# Altium PCB bb_kinetic_harvester.PcbDoc
Units mil, origin at the board's own origin, x right, y up, seen from the top; angles counter-clockwise.
Board outline 1595 x 1050 mil, 2 copper layers (Top Layer, Bottom Layer); 17 components, 23 nets, 87 pads, 19 vias.
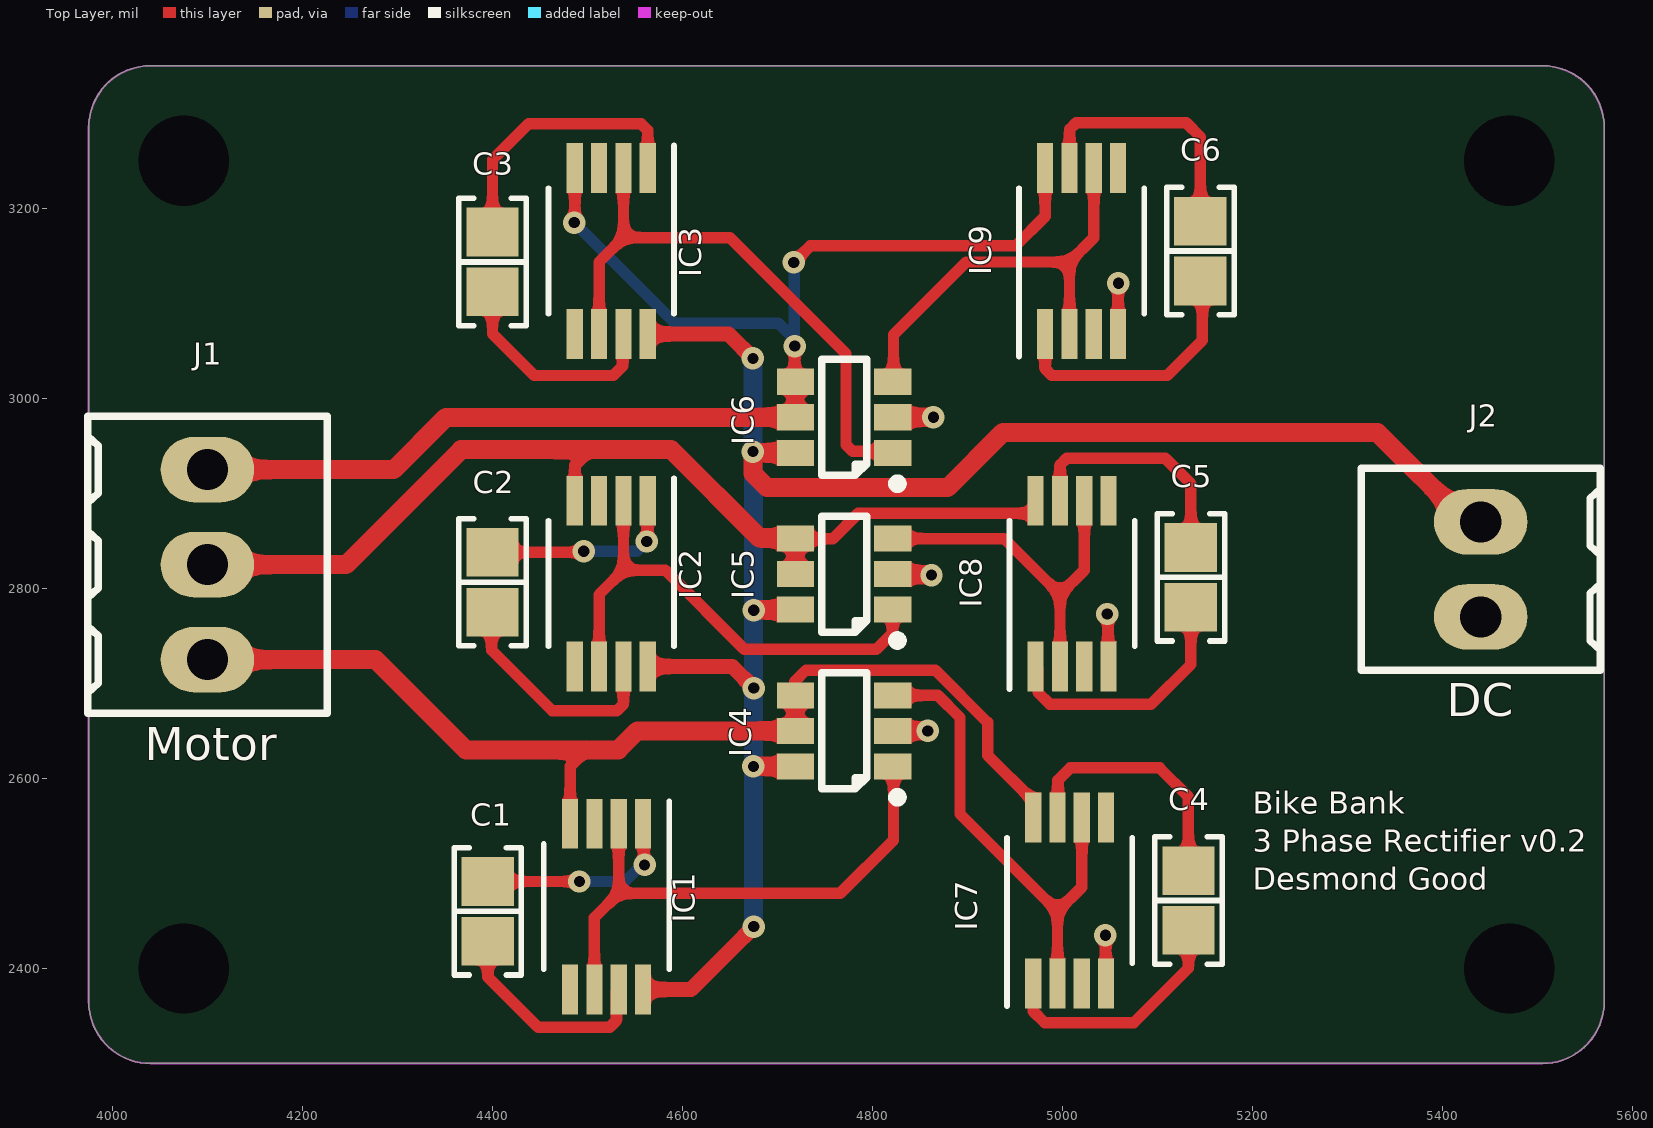
[diagram p0: Top Layer view]
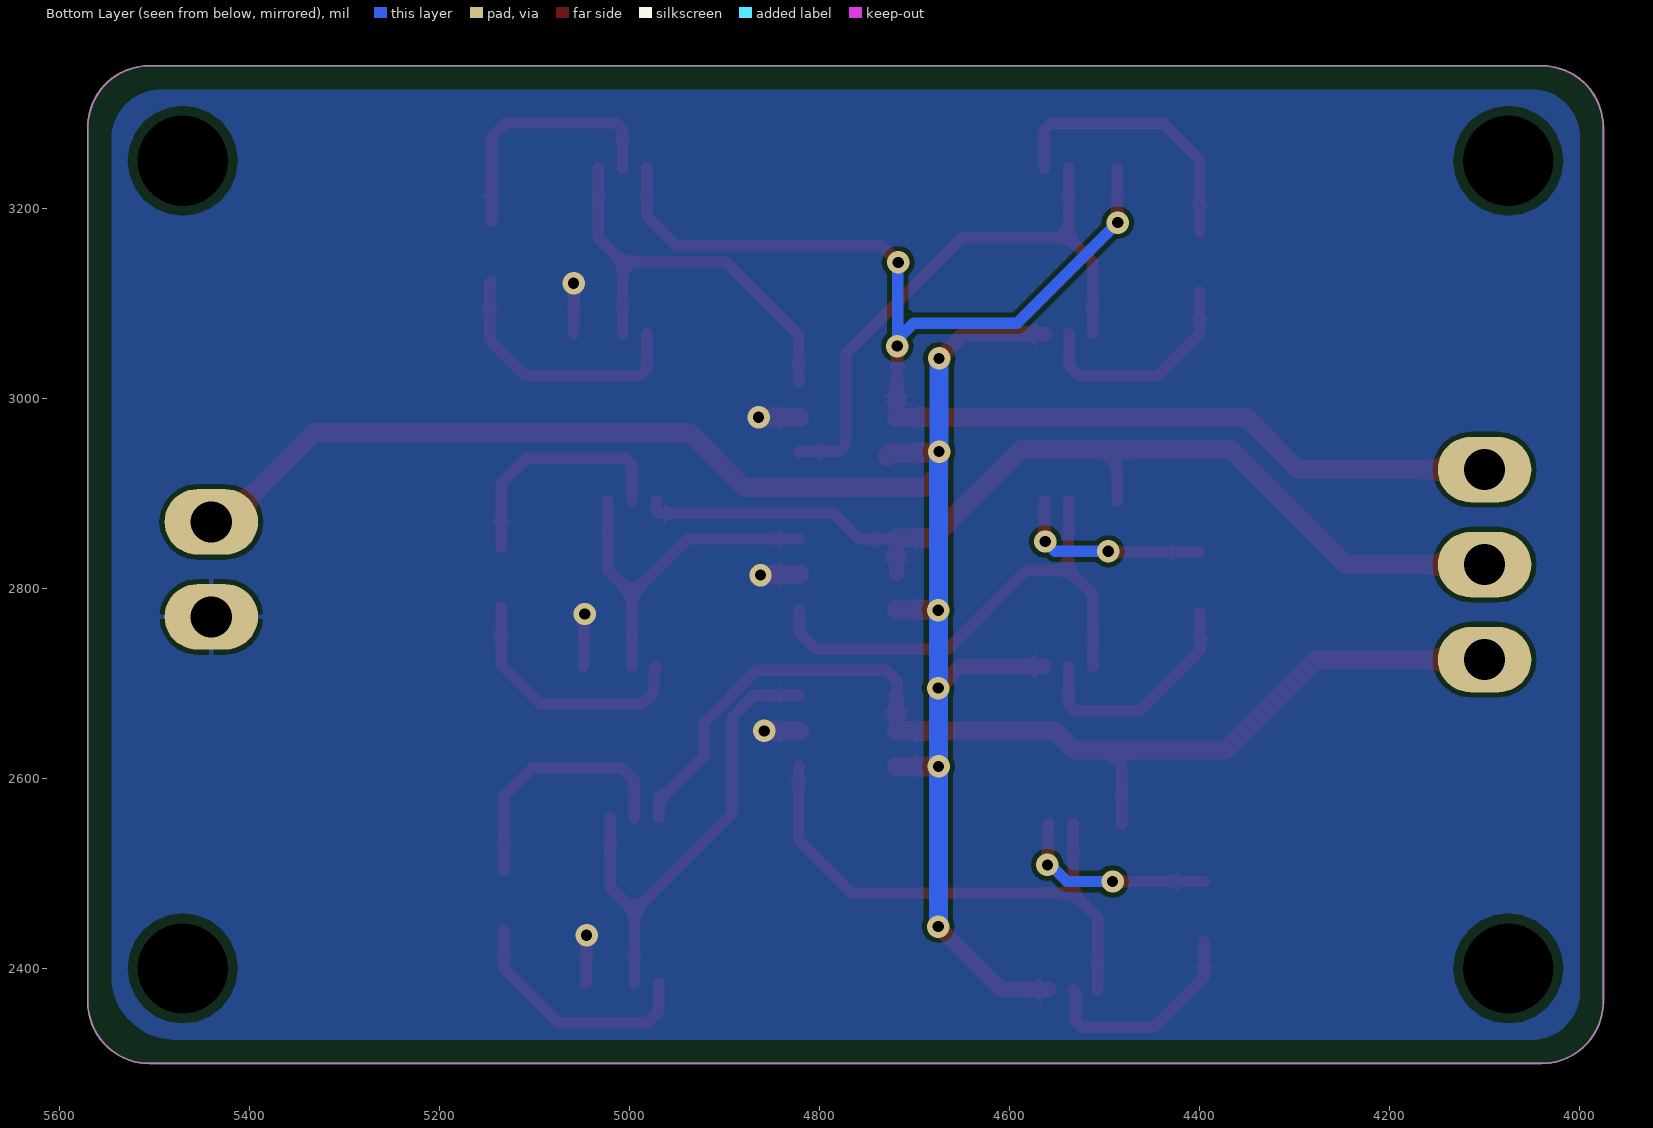
[diagram p1: Bottom Layer view, seen from below]
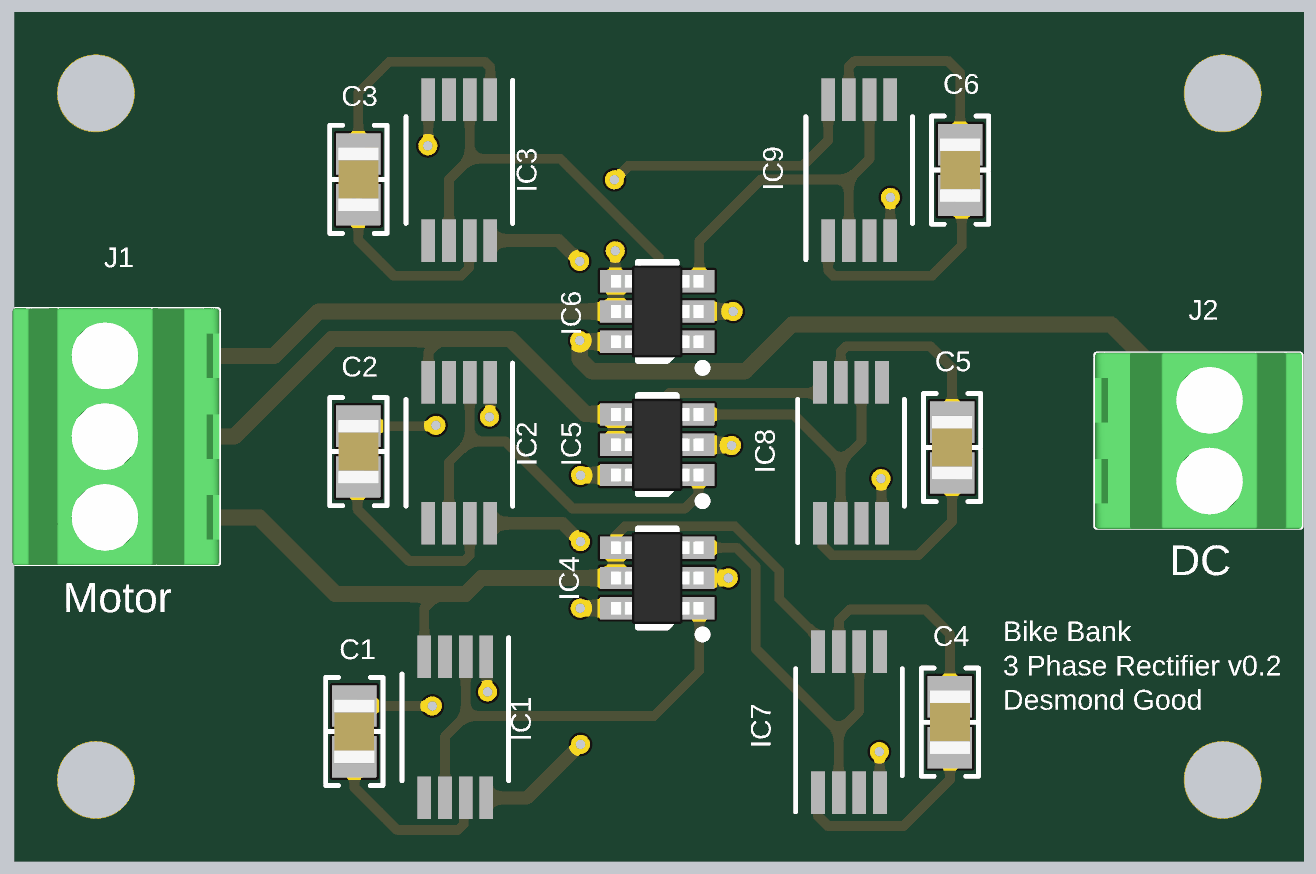
[diagram p2: 3D render of the assembled board from above, using the file's embedded part models]

## Layer stack, top to bottom
Top Solder: solder mask 0.4, Solder Resist, Dk 3.5
Top Layer: signal copper 1.4
Dielectric 1: dielectric 12.6, FR-4, Dk 4.8
Bottom Layer: signal copper 1.4
Bottom Solder: solder mask 0.4, Solder Resist, Dk 3.5

## Board outline
3975,2365 3975,3285 cw(c4040,3285) 4040,3350 5505,3350 cw(c5505,3285) 5570,3285 5570,2365 cw(c5505,2365) 5505,2300 4040,2300 cw(c4040,2365)

## Design rules (kind name [scope] priority, off if disabled: settings)
AssemblyTestpoint [All] p1: testpointundercomponent=FALSE minsize=40 maxsize=100 preferedsize=60 minholesize=0 maxholesize=40 preferedholesize=32 testpointgrid=1 usegrid=TRUE gridtolerance=0.01 allowsidetop=TRUE allowsidebottom=TRUE
BoardOutlineClearance [All] p1: gap=7.87 ignorepadtopadclearanceinfootprint=FALSE
Clearance [All] p1: gap=5 ignorepadtopadclearanceinfootprint=FALSE except(9.84: Arc-Hole Track-Hole SMDPad-Hole THPad-Hole Via-Hole Fill-Hole Poly-Hole Region-Hole Text-Hole)
ComponentClearance [All] p1: gap=5 collisioncheckmode=3 verticalgap=5 showdistances=TRUE
DiffPairsRouting [All] p1: maxlimit=10 minlimit=5 mostfreqgap=5 toplayer_minwidth=5 toplayer_maxwidth=1000 toplayer_prefwidth=5 bottomlayer_minwidth=5 bottomlayer_maxwidth=1000 bottomlayer_prefwidth=5 maxuncoupledlength=500
Height [All] p1: minheight=0 maxheight=71497.94 prefheight=500
HoleSize [All] p1: absolutevalues=TRUE maxlimit=248.03 minlimit=11.81 maxpercent=80.000 minpercent=20.000
HoleToHoleClearance [All] p1: gap=9.84 allowstackedmicrovias=FALSE
MinimumAnnularRing [All] p1: minimumring=3
MinimumSolderMaskSliver [All] p1: minsoldermaskwidth=0
PlaneClearance [All] p1: clearance=5
PlaneConnect PlaneConnectPowerPads [InPadClass('PowerPads')] p1: planeconnectstyle=Direct reliefexpansion=20 reliefentries=4 reliefconductorwidth=10 reliefairgap=10
PlaneConnect [All] p2: pad.planeconnectstyle=Relief pad.reliefexpansion=11.81 pad.reliefentries=4 pad.reliefconductorwidth=5 pad.reliefairgap=5 via.planeconnectstyle=Direct via.reliefexpansion=11.81 via.reliefentries=4 via.reliefconductorwidth=5 via.reliefairgap=5
PolygonConnect PolygonConnectPowerPads [All vs (InPadClass('PowerPads'))] p1: connectstyle=Direct reliefconductorwidth=10 reliefentries=4 polygonreliefangle="90 Angle" airgapwidth=10
PolygonConnect [All] p2: thpad.connectstyle=Relief thpad.reliefconductorwidth=5 thpad.reliefentries=4 thpad.polygonreliefangle="90 Angle" thpad.airgapwidth=5 smdpad.connectstyle=Relief smdpad.reliefconductorwidth=5 smdpad.reliefentries=4 smdpad.polygonreliefangle="90 Angle" smdpad.airgapwidth=5 via.connectstyle=Direct via.reliefconductorwidth=5 via.reliefentries=4 via.polygonreliefangle="90 Angle" via.airgapwidth=5
RoutingVias [All] p1: holewidth=11.81 width=23.62 viastyle="Through Hole" minholewidth=11.81 minwidth=23.62 maxholewidth=23.62 maxwidth=259.84
SilkToSilkClearance [All] p1: silktosilkclearance=0
SilkToSolderMaskClearance [IsPad] p1: minsilkscreentomaskgap=5 clearancetoexposedcopper=TRUE
SolderMaskExpansion [All] p1: expansion=2.95 istentingtop=FALSE
Width [All] p1: maxlimit=1000 minlimit=5 preferedwidth=5 minimp=50.000000 maximp=50.000000 favimp=50.000000
19 further rules are at their usual default settings.

## Components (designator, comment, footprint, x,y, rotation, side; value= is the part's Value field where it differs from the comment)
C1 "1µF" "CAP 0805_2012" 4395,2460 r90 top
C2 "1µF" "CAP 0805_2012" 4400,2806.5 r90 top
C3 "1µF" "CAP 0805_2012" 4400,3143.5 r90 top
C4 "1µF" "CAP 0805_2012" 5132.4,2471.5 r270 top
C5 "1µF" "CAP 0805_2012" 5135,2811.5 r270 top
C6 "1µF" "CAP 0805_2012" 5145,3155 r270 top
IC1 "LM74670QDGKTQ1" TI_8VSSOP 4520,2465 r270 top
IC2 "LM74670QDGKTQ1" TI_8VSSOP 4525,2805 r270 top
IC3 "LM74670QDGKTQ1" TI_8VSSOP 4525,3155 r270 top
IC4 "FDC6401N" "FAIRCHILD SOT-23-6 SUPERSOT-6" 4770,2650 r180 top
IC5 "FDC6401N" "FAIRCHILD SOT-23-6 SUPERSOT-6" 4770,2815 r180 top
IC6 "FDC6401N" "FAIRCHILD SOT-23-6 SUPERSOT-6" 4770,2980 r180 top
IC7 "LM74670QDGKTQ1" TI_8VSSOP 5007.4,2471.5 r90 top
IC8 "LM74670QDGKTQ1" TI_8VSSOP 5010,2805 r90 top
IC9 "LM74670QDGKTQ1" TI_8VSSOP 5020,3155 r90 top
J1 "282834-3" "TE 282834-3" 4100,2825 r90 top
J2 "282834-2" "TE 282834-2" 5440,2820 r270 top

## Footprints (in the part's own frame and the unit in brackets; to place one, negate y for a bottom-side part, rotate by r counter-clockwise, add the part's x,y. Pads: shape width x height; smd on the part's side, far side on the other; paste and mask are expansions set on the pad)
"CAP 0805_2012" [mm] "Chip Capacitor, 2-Leads, Body 2.00x1.20mm, IPC Medium Density"
  rect 1.3x1.4 smd: 1(-0.8,0) 2(0.8,0)
  silkscreen extent -1.7,-0.9 1.7,0.9, body extent -1,-0.64 1,0.64, height 1.26
"FAIRCHILD SOT-23-6 SUPERSOT-6" [mm] "SOT23, 6-Leads, Body 2.9x1.6mm, Pitch 0.95mm, IPC Medium Density"
  rect 1x0.7 smd: 1(-1.3,0.95) 2(-1.3,0) 3(-1.3,-0.95) 4(1.3,-0.95) 5(1.3,0) 6(1.3,0.95)
  silkscreen extent -1.55,-1.55 0.6,1.9, body extent -1.46,-1.45 1.46,1.45, height 1.45
"TE 282834-2" [mm]
  oval 1.75x2.5 hole 1.1: 1(-1.27,0) 2(1.27,0)
  silkscreen extent -2.7,-3.2 2.7,3.2, body extent -2.77,-3.25 2.77,3.25, height 10
"TE 282834-3" [mm]
  oval 1.75x2.5 hole 1.1: 1(-2.54,0) 2(0,0) 3(2.54,0)
  silkscreen extent -3.97,-3.2 3.97,3.2, body extent -4.04,-3.25 4.04,3.25, height 10
TI_8VSSOP [mil]
  rect 52.5x17 smd paste+0 mask+0: 1(-87.25,38.39) 2(-87.25,12.8) 3(-87.25,-12.8) 4(-87.25,-38.39) 5(87.25,-38.39) 6(87.25,-12.8) 7(87.25,12.8) 8(87.25,38.39)
  silkscreen extent -111,-66 66,66, body extent 0,0 10,10, height 10

## Part data
C1 C2 C3 C4 C5 C6: library part GCM21BR71H105KA03L, "CAP CER 1UF 50V X7R 0805", Device Package="0805 (2012 Metric)", Manufacturer="Murata Electronics", Operating Temperature="-55°C ~ 125°C", Ratings=AEC-Q200, Supplier Part Number 1=490-10675-1-ND, Temperature Coefficient=X7R, Tolerance=±10%, Voltage - Rated=50V, Applications=Automotive, Capacitance=1µF, ComponentLink1Description=Datasheet, ComponentLink1URL=https://www.murata.com/~/media/webrenewal/support/library/catalog/products/capacitor/mlcc/c03e.ashx?la=en-us, ComponentLink2Description="DigiKey Link", ComponentLink2URL=http://digikey.com/product-detail/en/murata-electronics/GCM21BR71H105KA03L/490-10675-1-ND/5251430, LastUpdated="2020-09-02 1:04:41 AM", Lifecycle Status=Active, Minimum Order=1, Mounting Type="Surface Mount, MLCC", Package / Case="0805 (2012 Metric)", Packaging=TapeAndReel, Part Number=GCM21BR71H105KA03L, Part Status=Active, PartId=2659, Price=0.08, Series=GCM, Size / Dimension="0.079\" L x 0.049\" W (2.00mm x 1.25mm)", Supplier 1=DigiKey, Thickness (Max)="0.055\" (1.40mm)"
IC1 IC2 IC3 IC7 IC8 IC9: library part "TI LM74670-Q1", "Zero IQ Smart Diode Rectifier Controller", ManufacturerPartNumber=LM74670QDGKTQ1, Supplier 1=Digi-Key
IC4 IC5 IC6: "MOSFET 2N-CH 20V 3A SSOT-6", Current - Continuous Drain (Id) @ 25°C=3A, Drain to Source Voltage (Vdss)=20V, Input Capacitance (Ciss) (Max) @ Vds="324pF @ 10V", Manufacturer="ON Semiconductor", Operating Temperature="-55°C ~ 150°C (TJ)", Package / Case="SOT-23-6 Thin, TSOT-23-6", Power - Max=700mW, Supplier Device Package=SuperSOT™-6, Supplier Part Number 1=FDC6401NCT-ND, ComponentLink1Description=Datasheet, ComponentLink1URL=https://www.onsemi.com/pub/Collateral/FDC6401N-D.pdf, ComponentLink2Description="DigiKey Link", ComponentLink2URL=http://digikey.com/product-detail/en/on-semiconductor/FDC6401N/FDC6401NCT-ND/1626191, FET Feature=Standard, FET Type="2 N-Channel (Dual)", Gate Charge (Qg) (Max) @ Vgs="4.6nC @ 4.5V", LastUpdated="2020-09-02 1:30:17 AM", Lifecycle Status=Active, Minimum Order=1, Mounting Type="Surface Mount", Packaging=TapeAndReel, Part Number=FDC6401N, Part Status=Active, Price=0.17, Rds On (Max) @ Id, Vgs="70mOhm @ 3A, 4.5V", Series=PowerTrench®, Supplier 1=DigiKey, Vgs(th) (Max) @ Id="1.5V @ 250µA"
J1: "TERM BLK 3P SIDE ENT 2.54MM PCB", Color=Green, Current=10A, Manufacturer="TE Connectivity AMP Connectors", Supplier Part Number 1=A98334-ND, Voltage=150V, ComponentLink1Description=Datasheet, ComponentLink1URL=https://www.te.com/commerce/DocumentDelivery/DDEController?Action=srchrtrv&DocNm=282834&DocType=Customer+Drawing&DocLang=English, ComponentLink2Description="DigiKey Link", ComponentLink2URL=http://digikey.com/product-detail/en/te-connectivity-amp-connectors/282834-3/A98334-ND/1153264, LastUpdated="2020-01-15 4:15:50 AM", Lifecycle Status=Active, Mating Orientation="Horizontal with Board", Minimum Order=1, Mounting Type="Through Hole", Number of Levels=1, Packaging=Bulk, Part Number=282834-3, Part Status=Active, Pitch="0.100\" (2.54mm)", Positions Per Level=3, Price=2.01, Series=Buchanan, Supplier 1=DigiKey, Wire Gauge="16-30 AWG", Wire Termination="Screw - Rising Cage Clamp"
J2: "TERM BLK 2P SIDE ENT 2.54MM PCB", Color=Green, Current=10A, Manufacturer="TE Connectivity AMP Connectors", Supplier Part Number 1=A98333-ND, Voltage=150V, ComponentLink1Description=Datasheet, ComponentLink1URL=https://www.te.com/commerce/DocumentDelivery/DDEController?Action=srchrtrv&DocNm=282834&DocType=Customer+Drawing&DocLang=English, ComponentLink2Description="DigiKey Link", ComponentLink2URL=http://digikey.com/product-detail/en/te-connectivity-amp-connectors/282834-2/A98333-ND/1150135, LastUpdated="2020-01-15 4:15:38 AM", Lifecycle Status=Active, Mating Orientation="Horizontal with Board", Minimum Order=1, Mounting Type="Through Hole", Number of Levels=1, Packaging=Bulk, Part Number=282834-2, Part Status=Active, Pitch="0.100\" (2.54mm)", Positions Per Level=2, Price=0.88, Series=Buchanan, Supplier 1=DigiKey, Wire Gauge="16-30 AWG", Wire Termination="Screw - Rising Cage Clamp"

## Free pads (board coordinates)
  round 60 hole 95: 1(4075,2400) 1(4075,3250) 1(5470,2400) 1(5470,3250)

## Via types
v1: diameter 23.62, hole 11.81, Top Layer to Bottom Layer, 19 vias

## Nets (pads, with @x,y where several pads share a name; then routed paths per layer and width w, separated by ;. In a path a pad name is that pad's centre, name@x,y a point inside that pad or via, vN(x,y) a via of type N, cw(c..) or ccw(c..) an arc to the next point about the centre after c; other vN are vias at no path point)
GND: IC4.2 IC5.2 IC6.2 IC7.4 IC8.4 IC9.4 J2.2 | length 281.3
  Top Layer w12: v1(5045,2435) 5045.39,2434.61 5045.39,2384.64 IC7.4 ; v1(5047,2773) 5047.69,2772.31 5047.69,2718.44 IC8.4 ; IC9.4 5058.39,3120.91 v1(5058.67,3121.2)
  Top Layer w20: IC4.2 v1(4858,2650) ; IC5.2 4821.68,2814.5 4861.5,2814.5 v1(4862,2814) ; IC6.2 v1(4864,2980)
IC4A_DRIVE: IC1.2 IC1.6 IC4.1 | length 575.4
  Top Layer w12: IC1.6 4507.2,2453.45 4532.8,2479.05 ; IC1.2 4532.8,2479.05 ; IC4.1 4822,2611.78 4822,2535 4766.05,2479.05 4532.8,2479.05
IC4B_DRIVE: IC4.3 IC7.2 IC7.6 | length 512.2
  Top Layer w12: IC4.3 4868.6,2687.4 4892,2664 4892,2562.55 4994.6,2459.95 ; IC7.2 4994.6,2459.95 ; IC7.6 5020.19,2485.54 4994.6,2459.95
IC5A_DRIVE: IC2.2 IC2.6 IC5.1 | length 534.4
  Top Layer w12: IC2.6 4512.2,2793.45 4537.8,2819.05 ; IC2.2 4537.8,2819.05 ; IC5.1 4821,2777.42 4821,2753 4804,2736 4665,2736 4581.95,2819.05 4537.8,2819.05
IC5B_DRIVE: IC5.3 IC8.2 IC8.6 | length 385.5
  Top Layer w12: IC5.3 4938.26,2852.4 4997.2,2793.45 ; IC8.2 4997.2,2793.45 ; IC8.6 5022.8,2819.05 4997.2,2793.45
IC6A_DRIVE: IC3.2 IC3.6 IC6.1 | length 618.4
  Top Layer w12: IC3.6 4512.2,3143.45 4537.8,3169.05 ; IC3.2 4537.8,3169.05 ; IC6.1 4819.68,2944.1 4779.03,2944.1 4772,2951.13 4772,3047 4649.95,3169.05 4537.8,3169.05
IC6B_DRIVE: IC6.3 IC9.2 IC9.6 | length 451.9
  Top Layer w12: IC6.3 4822,3018.22 4822,3067 4898.45,3143.45 5007.2,3143.45 ; IC9.2 5007.2,3143.45 ; IC9.6 5032.8,3169.05 5007.2,3143.45
NetC1_1: C1.1 IC1.7 | length 231.4
  Top Layer w12: C1.1 4395,2391 4448,2338 4523.27,2338 4530.3,2345.03 4530.3,2375.25 IC1.7
NetC1_2: C1.2 IC1.1 | length 216.2
  Top Layer w12: C1.2 v1(4491.5,2491.5) ; IC1.1 4559.19,2551.44 4559.19,2509.81 v1(4560,2509)
  Bottom Layer w12: v1(4491.5,2491.5) 4539.35,2491.5 4556.86,2509 v1(4560,2509)
NetC2_1: C2.1 IC2.7 | length 248.4
  Top Layer w12: C2.1 4399,2774 4399,2735 4463,2671 4530.77,2671 4537.8,2678.03 IC2.7
NetC2_2: C2.2 IC2.1 | length 210.4
  Top Layer w12: C2.2 4494.99,2837.99 v1(4496,2839) ; v1(4562.29,2849.29) 4563.19,2850.19 4563.19,2892.06 IC2.1
  Bottom Layer w12: v1(4496,2839) 4552,2839 v1(4562.29,2849.29)
NetC3_1: C3.1 IC3.7 | length 237.5
  Top Layer w12: C3.1 4400,3068 4444,3024 4527,3024 4537,3034 4537,3066.95 IC3.7
NetC3_2: C3.2 IC3.1 | length 297.8
  Top Layer w12: C3.2 4400,3251 4438,3289 4556.36,3289 4563.39,3281.97 IC3.1
NetC4_1: C4.1 IC7.7 | length 272.4
  Top Layer w12: IC7.7 4995,2559.14 4995,2598 5008,2611 5102,2611 5132.4,2580.6 C4.1
NetC4_2: C4.2 IC7.1 | length 261
  Top Layer w12: IC7.1 4969,2355.03 4981.03,2343 5075,2343 5132.4,2400.4 C4.2
NetC5_1: C5.1 IC8.7 | length 256.6
  Top Layer w12: IC8.7 4997.2,2929.97 5004.23,2937 5108,2937 5135,2910 C5.1
NetC5_2: C5.2 IC8.1 | length 271.7
  Top Layer w12: IC8.1 4974.11,2715.25 4974.11,2690.53 4986.65,2678 5093,2678 5135,2720 C5.2
NetC6_1: C6.1 IC9.7 | length 276.1
  Top Layer w12: IC9.7 5007.2,3282.97 5014.23,3290 5130,3290 5145,3275 C6.1
NetC6_2: C6.2 IC9.1 | length 283.7
  Top Layer w12: IC9.1 4981.61,3031.03 4988.64,3024 5110,3024 5147,3061 5147,3121.5 C6.2
PHASE_A: IC1.4 IC4.4 IC4.5 IC7.8 J1.1 | length 1154.7
  Top Layer w12: IC1.4 4481.61,2612.61 4499,2630 ; IC4.4 4718,2688.22 4718,2702 4730,2714 4866.04,2714 4921.08,2658.97 4921.08,2624.43 4969.01,2576.5 IC7.8
  Top Layer w16: IC4.5 IC4.4
  Top Layer w20: J1.1 4277,2725 4372,2630 4499,2630 4532.46,2630 4552.46,2650 IC4.5
PHASE_B: IC2.4 IC5.4 IC5.5 IC8.8 J1.2 | length 1081.6
  Top Layer w12: IC2.4 4486.61,2929.61 4503,2946 ; IC5.4 4719.22,2852 4758,2852 4785,2879 4969.11,2879 4971.61,2881.5 IC8.8
  Top Layer w16: IC5.5 IC5.4
  Top Layer w20: J1.2 4246,2825 4367,2946 4503,2946 4588,2946 4681,2853 4718.22,2853 IC5.4
PHASE_C: IC3.4 IC6.4 IC6.5 IC9.8 J1.3 | length 1480.5
  Top Layer w12: v1(4486,3185) 4486.61,3185.61 IC3.4 ; v1(4717,3143) 4734.45,3160.45 4950.45,3160.45 4981.61,3191.61 IC9.8 ; v1(4718,3055) 4718,3018.22 IC6.4
  Top Layer w16: IC6.5 IC6.4
  Top Layer w20: J1.3 4296,2925 4351,2980 IC6.5
  Bottom Layer w12: v1(4486,3185) 4592,3079 4701,3079 v1@4717.5,3062.5 ; v1(4717,3143) 4717.5,3142.5 v1@4717.5,3062.5 ; v1(4718,3055) 4717.5,3055.5 v1@4717.5,3062.5
VDD: IC1.8 IC2.8 IC3.8 IC4.6 IC5.6 IC6.6 J2.1 | length 1988.3
  Top Layer w16: IC1.8 4608.75,2377.75 v1(4675,2444) ; IC2.8 4652.25,2717.75 v1(4675,2695) ; IC3.8 4648.25,3067.75 v1(4674,3042)
  Top Layer w20: v1(4674.57,2612.57) IC4.6 ; v1(4675,2777) 4675.3,2777.3 4718.52,2777.3 IC5.6 ; IC6.6@4728.5,2938.82 4724.72,2942.6 IC6.6 4675.4,2942.6 v1(4674,2944) 4674,2921 4689,2906 4879,2906 4937,2964 5331.24,2964 5425.24,2870 J2.1
  Bottom Layer w20: v1(4674,3042) v1(4674,2944) 4674.5,2943.5 4674.5,2777.5 v1(4675,2777) 4674.79,2776.79 4674.79,2612.78 v1(4674.57,2612.57) 4674.79,2612.36 4674.79,2444.21 v1(4675,2444)
pads on no net: IC1.3 IC1.5 IC2.3 IC2.5 IC3.3 IC3.5 IC7.3 IC7.5 IC8.3 IC8.5 IC9.3 IC9.5

## Polygon pours and split planes (outlines as drawn)
GND on Bottom Layer "GND_L02_P000" (solid, pour order 0): 4000,2375 4000,3275 cw(c4050,3275) 4050,3325 5489.95,3325 cw(c5492.48,3272.48) 5545,3275 5545,2390 cw(c5477.56,2392.44) 5475,2325 4050,2325 cw(c4050,2375)

## Keep-outs
Keep-Out Layer:
  the board outline again, w2

## Silkscreen, mask and mechanical layers (free items; w line width, h text height)
Top Overlay:
  text "DC" at 5404,2653.67 h60
  text "Motor" at 4034,2607.61 h60
  text "Bike Bank / 3 Phase Rectifier v0.2 / Desmond Good" at 5200,2475 h40

## Text inside footprints (layer, text, board x,y; h text height)
IC1: Mechanical 13 "*" at 4528,2523.5 h50 r270; Mechanical 7 "0.122in/3.099mm" at 4676,2558.75 h25 r270; Mechanical 7 "0.199in/5.055mm" at 4751,2558.75 h25 r270; Mechanical 7 "0.122in/3.099mm" at 4507.5,2284 h25 r270; Mechanical 7 "0.026in/0.65mm" at 4533.09,2847.25 h25 r270; Mechanical 7 "0.028in/0.711mm" at 4339,2644.25 h25 r270
IC2: Mechanical 13 "*" at 4533,2863.5 h50 r270; Mechanical 7 "0.028in/0.711mm" at 4344,2984.25 h25 r270; Mechanical 7 "0.026in/0.65mm" at 4538.09,3187.25 h25 r270; Mechanical 7 "0.122in/3.099mm" at 4512.5,2624 h25 r270; Mechanical 7 "0.199in/5.055mm" at 4756,2898.75 h25 r270; Mechanical 7 "0.122in/3.099mm" at 4681,2898.75 h25 r270
IC3: Mechanical 13 "*" at 4533,3213.5 h50 r270; Mechanical 7 "0.122in/3.099mm" at 4681,3248.75 h25 r270; Mechanical 7 "0.199in/5.055mm" at 4756,3248.75 h25 r270; Mechanical 7 "0.122in/3.099mm" at 4512.5,2974 h25 r270; Mechanical 7 "0.026in/0.65mm" at 4538.09,3537.25 h25 r270; Mechanical 7 "0.028in/0.711mm" at 4344,3334.25 h25 r270
IC7: Mechanical 13 "*" at 4999.4,2413 h50 r90; Mechanical 7 "0.028in/0.711mm" at 5188.4,2292.25 h25 r90; Mechanical 7 "0.026in/0.65mm" at 4994.31,2089.25 h25 r90; Mechanical 7 "0.122in/3.099mm" at 5019.9,2652.5 h25 r90; Mechanical 7 "0.199in/5.055mm" at 4776.4,2377.75 h25 r90; Mechanical 7 "0.122in/3.099mm" at 4851.4,2377.75 h25 r90
IC8: Mechanical 13 "*" at 5002,2746.5 h50 r90; Mechanical 7 "0.122in/3.099mm" at 4854,2711.25 h25 r90; Mechanical 7 "0.199in/5.055mm" at 4779,2711.25 h25 r90; Mechanical 7 "0.122in/3.099mm" at 5022.5,2986 h25 r90; Mechanical 7 "0.026in/0.65mm" at 4996.91,2422.75 h25 r90; Mechanical 7 "0.028in/0.711mm" at 5191,2625.75 h25 r90
IC9: Mechanical 13 "*" at 5012,3096.5 h50 r90; Mechanical 7 "0.028in/0.711mm" at 5201,2975.75 h25 r90; Mechanical 7 "0.026in/0.65mm" at 5006.91,2772.75 h25 r90; Mechanical 7 "0.122in/3.099mm" at 5032.5,3336 h25 r90; Mechanical 7 "0.199in/5.055mm" at 4789,3061.25 h25 r90; Mechanical 7 "0.122in/3.099mm" at 4864,3061.25 h25 r90